# Altium PCB DriverBoard.PcbDoc
Units mil, origin at the board's own origin, x right, y up, seen from the top; angles counter-clockwise.
Board outline 3959.27 x 1236.07 mil, 2 copper layers (Top Layer, Bottom Layer); 45 components, 38 nets, 213 pads, 82 vias.
Unrouted connection lines stored in the file: 41.
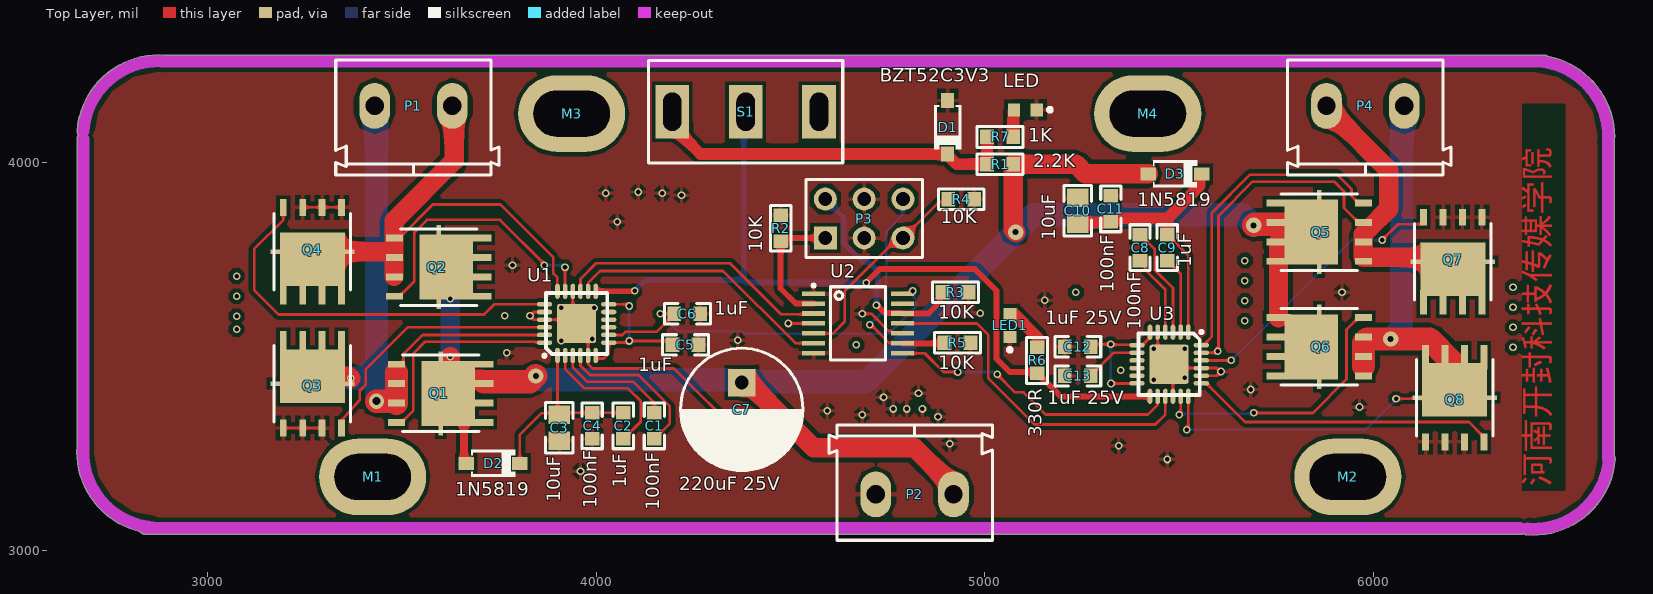
[diagram p0: Top Layer view]
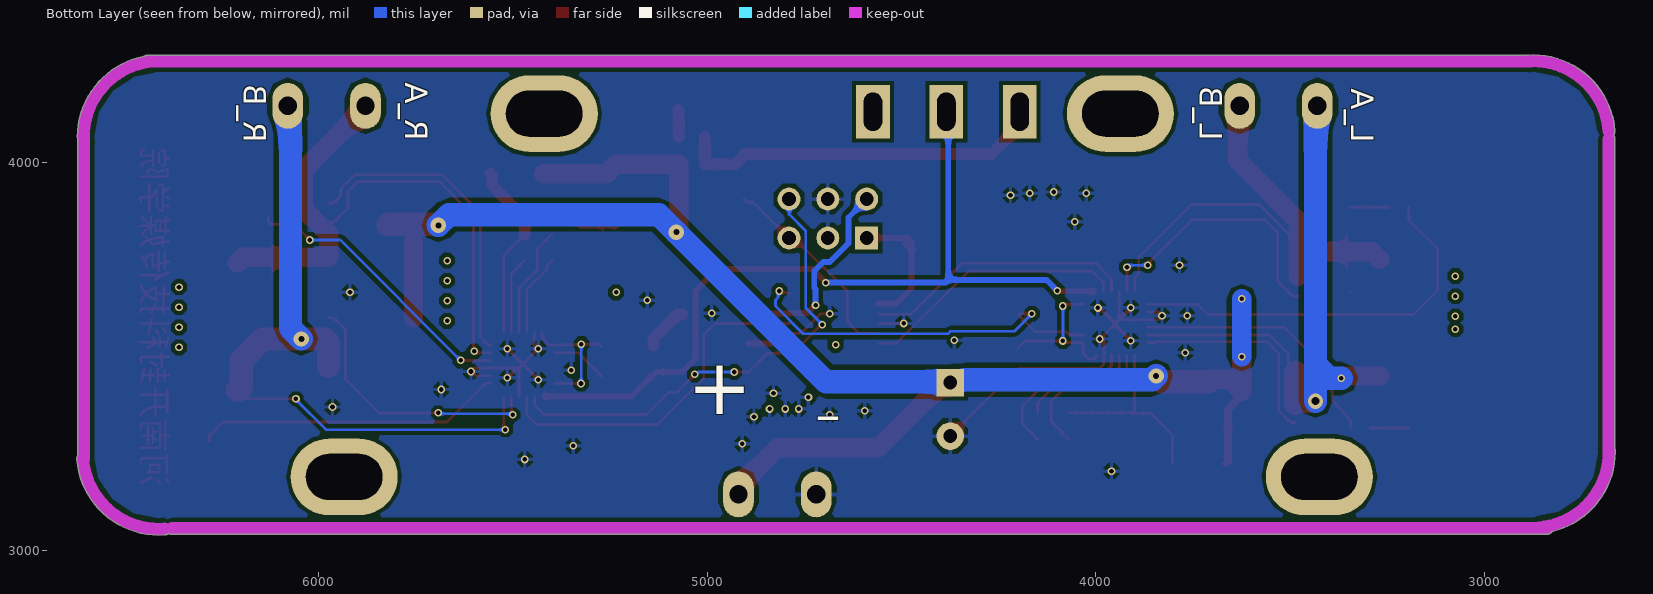
[diagram p1: Bottom Layer view, seen from below]
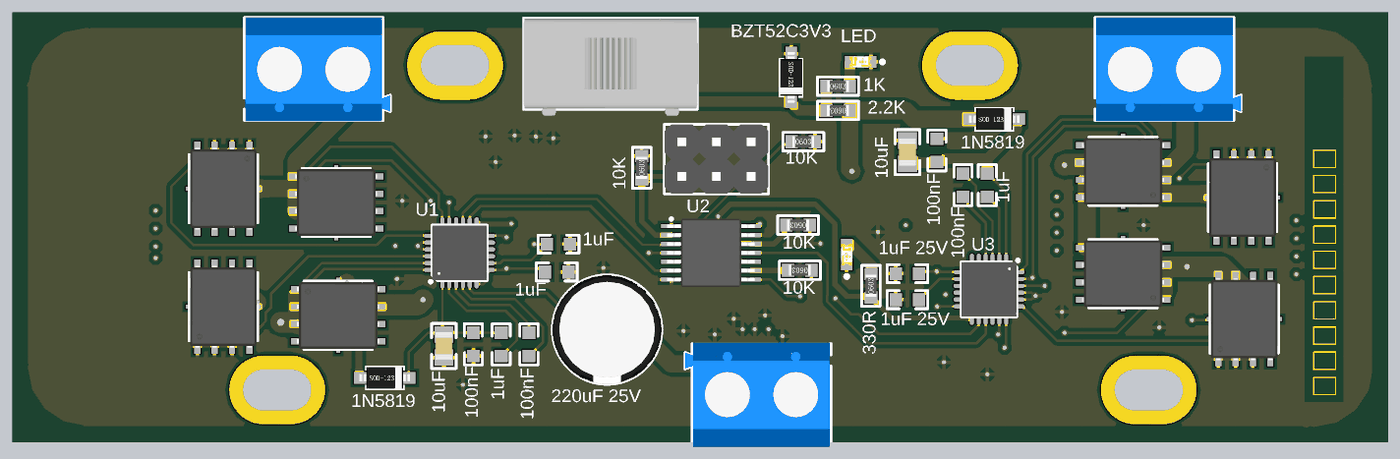
[diagram p2: 3D render of the assembled board from above, using the file's embedded part models]

## Layer stack, top to bottom
Top Solder: solder mask 0.4, Solder Resist, Dk 3.5
Top Layer: signal copper 1.4
Dielectric 1: dielectric 12.6, FR-4, Dk 4.8
Bottom Layer: signal copper 1.4
Bottom Solder: solder mask 0.4, Solder Resist, Dk 3.5

## Board outline
2826.74,3049.25 cw(c2875,3255) 2664.24,3270.59 2664.24,4060 cw(c2680,4060) 2667.82,4070 cw(c2680,4080) 2664.28,4081.21 cw(c2875,4065) 2890.59,4275.76 6440,4275.76 cw(c6440,4260) 6449.44,4272.63 cw(c6410,4065) 6621.34,4065 cw(c6410,4065) 6620.76,4049.41 6620.76,3244.59 cw(c6607.17,3236.61) 6622.93,3236.61 cw(c6607.17,3236.61) 6622.89,3235.4 cw(c6412.17,3251.61) 6395.96,3040.89 cw(c6397.17,3056.61) 6386.73,3044.8 cw(c6377.77,3057.77) 6377.77,3042 2840,3042 cw(c2840,3057.77)

## Design rules (kind name [scope] priority, off if disabled: settings)
Clearance [All] p1: gap=10 ignorepadtopadclearanceinfootprint=TRUE except(0: Arc-Hole Track-Hole SMDPad-Hole THPad-Hole Via-Hole Fill-Hole Poly-Hole Region-Hole Text-Hole)
MinimumSolderMaskSliver [All] p1: minsoldermaskwidth=0
PolygonConnect [All] p1: connectstyle=Relief reliefconductorwidth=10 reliefentries=4 polygonreliefangle="90 Angle" airgapwidth=10
RoutingVias [All] p1: holewidth=28 width=50 viastyle="Through Hole" minholewidth=28 minwidth=50 maxholewidth=28 maxwidth=50
SolderMaskExpansion [All] p1: expansion=4 istentingtop=FALSE
Width [All] p1: maxlimit=60 minlimit=7 preferedwidth=10
29 further rules are at their usual default settings.

## Components (designator, comment, footprint, x,y, rotation, side; value= is the part's Value field where it differs from the comment)
C1 "100nF" CAPC1608[0603]S-N 4150,3321.54 r90 top
C2 "1uF" CAPC1608[0603]S-N 4070,3321.54 r90 top
C3 "10uF" CAPC2012[0805]S-N 3905,3316.54 r270 top
C4 "100nF" CAPC1608[0603]S-N 3990,3321.54 r270 top
C5 "1uF" CAPC1608[0603]S-N 4230,3530 r180 top
C6 "1uF" CAPC1608[0603]S-N 4235,3610 r180 top
C7 "220uF 25V" CAPPR3.5-8X11.5 4375,3363.9 r270 top value=220uF
C8 "100nF" CAPC1608[0603]S-N 5400,3780 r90 top
C9 "1uF" CAPC1608[0603]S-N 5470,3780 r90 top
C10 "10uF" CAPC2012[0805]S-N 5240,3875 r90 top
C11 "100nF" CAPC1608[0603]S-N 5325,3880 r90 top
C12 "1uF 25V" CAPC1608[0603]S-N 5240,3525 r0 top value=1uF
C13 "1uF 25V" CAPC1608[0603]S-N 5240,3450 r0 top value=1uF
D1 "BZT52C3V3" SOD-123-L 4905,4090 r270 top
D2 "1N5819" SOD-123-L 3735,3225 r0 top
D3 "1N5819" SOD-123-L 5490,3970 r0 top
LED "" LEDC1608(0603) 5105,4135 r180 top (schematic designator LED?)
LED1 "Blue" LEDC1608(0603) 5065,3580 r90 top
M1 "MountHole" M3-MountSlot 3407.83,3167.2 r0 top
M2 "MountHole" M3-MountSlot 5917.83,3167.2 r0 top
M3 "MountHole" M3-MountSlot 3920,4102.2 r0 top
M4 "MountHole" M3-MountSlot 5402.83,4102.2 r0 top
P1 "KF/WJ/DG 30x connecter" "KF/WJ/DG 301-2p-5.0mm" 3530,4145 r180 top
P2 "KF/WJ/DG 30x connecter" "KF/WJ/DG 301-2p-5.0mm" 4820,3145 r0 top
P3 "Header 3X2" HDR2X3 4590,3805 r0 top
P4 "KF/WJ/DG 30x connecter" "KF/WJ/DG 301-2p-5.0mm" 5980,4145 r180 top
Q1 "TPH1R403NL" DFN5x6 3600.31,3405 r270 top
Q2 "TPH1R403NL" DFN5x6 3595,3730 r270 top
Q3 "TPH1R403NL" DFN5x6 3270,3430 r0 top
Q4 "TPH1R403NL" DFN5x6 3270,3769.69 r180 top
Q5 "TPH1R403NL" DFN5x6 5860.83,3820 r90 top
Q6 "TPH1R403NL" DFN5x6 5860.83,3525 r90 top
Q7 "TPH1R403NL" DFN5x6 6205,3744.33 r180 top
Q8 "TPH1R403NL" DFN5x6 6210,3394.17 r0 top
R1 "2.2K" RESC1608[0603]S-N 5040,3995 r180 top
R2 "10K" RESC1608[0603]S-N 4475,3830 r90 top
R3 "10K" RESC1608[0603]S-N 4925,3665 r180 top
R4 "10K" RESC1608[0603]S-N 4940,3905 r0 top
R5 "10K" RESC1608[0603]S-N 4930,3535 r180 top
R6 "330R" RESC1608[0603]S-N 5135,3490 r90 top
R7 "1K" RESC1608[0603]S-N 5040,4065 r0 top
S1 "SW-SPDT" SS12D10 4385,4130 r180 top
U1 "DRV8701E" QFN24-4x4 3950,3585 r90 top
U2 "SN74HC125PWR" TSSOP-14 4674.17,3585 r0 top
U3 "DRV8701E" QFN24-4x4 5475,3480 r270 top

## Footprints (in the part's own frame and the unit in brackets; to place one, negate y for a bottom-side part, rotate by r counter-clockwise, add the part's x,y. Pads: shape width x height; smd on the part's side, far side on the other; paste and mask are expansions set on the pad)
CAPC1608[0603]S-N [mm]
  rect 0.9x0.95 smd: 1(-0.85,0) 2(0.85,0)
  silkscreen extent -1.5,-0.66 1.5,0.66, body extent -0.8,-0.41 0.8,0.41, height 0.79
CAPC2012[0805]S-N [mm]
  rect 1.2x1.4 smd: 1(-0.85,0) 2(0.85,0)
  silkscreen extent -1.65,-0.9 1.65,0.9, body extent -1,-0.63 1,0.62, height 1.25
CAPPR3.5-8X11.5 [mm]
  rect 1.8x1.8 hole 0.9: 1(-1.75,0)
  round 1.8 hole 0.9: 2(1.75,0)
  silkscreen extent -4,-4.01 4,4, body extent -4,-3.98 4,3.98, height 11.5
DFN5x6 [mm]
  rect 0.45x1.6 smd: 1(-1.905,2.65) 1(-0.635,2.65) 1(0.635,2.65) 1(1.905,2.65)
  rect 5.5x0.3 smd: 1(0,0)
  rect 4.25x3.5 smd: 1(0,0.5)
  rect 0.45x1.1 smd: 2(1.905,-2.9) 3(-1.905,-2.9) 3(-0.635,-2.9) 3(0.635,-2.9)
  silkscreen extent -2.5,-2.5 2.5,2.5, body extent -2.45,-3 2.45,3, height 1
HDR2X3 [mm]
  rect 1.5x1.5 hole 0.9: 1(0,0)
  round 1.5 hole 0.9: 2(0,2.54) 3(2.54,0) 4(2.54,2.54) 5(5.08,0) 6(5.08,2.54)
  silkscreen extent -1.27,-1.27 6.35,3.81, body extent -1.27,-1.27 6.35,3.81, height 8.54
"KF/WJ/DG 301-2p-5.0mm" [mm]
  oval 2x3 hole 1.2: 1(2.54,0) 2(-2.54,0)
  silkscreen extent -5.6,-3 5.08,4.52, body extent -5.6,-3 5,4.6, height 10
LEDC1608(0603) [mm]
  rect 0.8x0.85 smd: A(0.75,0) C(-0.75,0)
  silkscreen extent -1.73,-0.12 -1.48,0.12, body extent -0.8,-0.4 0.8,0.4, height 0.64
M3-MountSlot [mm]
  oval 7x5 hole 3 slot 5 at 0 deg: 1(0.436,0.579)
QFN24-4x4 [mm]
  rrect10% 2.55x2.55 smd: 0(0,0)
  oval 1x0.3 smd: 1(-2.1,1.25) 2(-2.1,0.75) 3(-2.1,0.25) 4(-2.1,-0.25) 5(-2.1,-0.75) 6(-2.1,-1.25) 13(2.1,-1.25) 14(2.1,-0.75) 15(2.1,-0.25) 16(2.1,0.25) 17(2.1,0.75) 18(2.1,1.25)
  oval 0.3x1 smd: 7(-1.25,-2.1) 8(-0.75,-2.1) 9(-0.25,-2.1) 10(0.25,-2.1) 11(0.75,-2.1) 12(1.25,-2.1) 19(1.25,2.1) 20(0.75,2.1) 21(0.25,2.1) 22(-0.25,2.1) 23(-0.75,2.1) 24(-1.25,2.1)
  silkscreen extent -2.21,-2 2,2.21, body extent -2,-2 2,2, height 0.9
RESC1608[0603]S-N [mm]
  rect 0.9x0.95 smd: 1(-0.85,0) 2(0.85,0)
  silkscreen extent -1.5,-0.67 1.5,0.67, body extent -0.8,-0.4 0.8,0.4, height 0.45
SOD-123-L [mm]
  rect 1x0.85 smd: A(-1.75,0) K(1.75,0)
  silkscreen extent -1.45,-0.9 1.47,0.9, body extent -1.85,-0.8 1.85,0.8, height 1.2
SS12D10 [mm]
  rect 2.2x3.5 hole 1.2 slot 2.5 at 90 deg mask+0.07: 1(-4.8,0) 2(0,0) 3(4.8,0)
  silkscreen extent -6.35,-3.35 6.35,3.35, body extent -6.4,-3.3 6.35,3.8, height 12.5
TSSOP-14 [mm]
  rect 1.5x0.3 smd mask+0.07: 1(-2.9,1.95) 2(-2.9,1.3) 3(-2.9,0.65) 4(-2.9,0) 5(-2.9,-0.65) 6(-2.9,-1.3) 7(-2.9,-1.95) 8(2.9,-1.95) 9(2.9,-1.3) 10(2.9,-0.65) 11(2.9,0) 12(2.9,0.65) 13(2.9,1.3) 14(2.9,1.95)
  silkscreen extent -2.99,-2.4 1.8,2.57, body extent -3.2,-2.5 3.2,2.5, height 1.13

## Part data
C1 C4 C8 C11: library part Cap-Chip_1, "贴片电容", Tolerance=±10%, Voltage=50V, Price(RMB)=0.000, Published=8-Jun-2000, Publisher="Altium Limited", Revision="July-2002: Re-released for DXP Platform."
C2 C5 C6 C9 C12 C13: library part Cap-Chip_2, "贴片电容", Tolerance=±10%, Voltage=25V, Price(RMB)=0.000, Published=8-Jun-2000, Publisher="Altium Limited", Revision="July-2002: Re-released for DXP Platform."
C3 C10: library part Cap-Chip, "贴片电容", Tolerance=±10%, Voltage=25V, Price(RMB)=0.000, Published=8-Jun-2000, Publisher="Altium Limited", Revision="July-2002: Re-released for DXP Platform."
C7: library part Cap-Elect, "Polarized Capacitor (Radial)", Voltage=25V, Price(RMB)=0.000, Published=8-Jun-2000, Publisher="Altium Limited", Revision="July-2002: Re-released for DXP Platform."
D1: library part "Diode Zen", "3.3V稳压二极管 SOD-123", Price(RMB)=0.000, Published=8-Jun-2000, Publisher="Altium Limited", Revision="July-2002: Re-released for DXP Platform."
D2 D3: library part "Diode Schottky", "肖特基二极管 Diode", Imax=500mA, PartNumber=1N5819, Price(RMB)=0.000, Published=8-Jun-2000, Publisher="Altium Limited", Revision="July-2002: Re-released for DXP Platform."
LED: library part "LED Chip Red", "Typical Chip LED", Price(RMB)=0.00, Published=8-Jun-2000, Publisher="Altium Limited", Revision="July-2002: Re-released for DXP Platform."
LED1: library part "LED Chip Blue", "Typical Chip LED", Color=Blue, Price(RMB)=0.00, Published=8-Jun-2000, Publisher="Altium Limited", Revision="July-2002: Re-released for DXP Platform."
M1 M2 M3 M4: "固定孔"
P1 P2 P4: library part "KF/WJ/DG 30x", "接线端子 2Pin"
P3: "Header, 3-Pin, Dual row", LatestRevisionDate=17-Jul-2002, LatestRevisionNote="Re-released for DXP Platform.", Price(RMB)=0.00, Publisher="Altium Limited"
Q1 Q2 Q3 Q4 Q5 Q6 Q7 Q8: "东芝 N沟 MOS"
R1: library part Res-Chip, "贴片电阻", Tolerance=±1%, Price(RMB)=0.000, Published=8-Jun-2000, Publisher="Altium Limited", Revision="July-2002: Re-released for DXP Platform."
R2 R3 R4 R5: library part Res-Chip_1, "贴片电阻", Tolerance=±1%, Price(RMB)=0.000, Published=8-Jun-2000, Publisher="Altium Limited", Revision="July-2002: Re-released for DXP Platform."
R6: library part Res-Chip_3, "贴片电阻", Tolerance=±1%, Price(RMB)=0.000, Published=8-Jun-2000, Publisher="Altium Limited", Revision="July-2002: Re-released for DXP Platform."
R7: library part Res-Chip_2, "贴片电阻", Tolerance=±1%, Price(RMB)=0.000, Published=8-Jun-2000, Publisher="Altium Limited", Revision="July-2002: Re-released for DXP Platform."
S1: "单刀双掷开关 3脚船型、钮子、拨动开关 SPDT Subminiature Toggle Switch", Price(RMB)=0.000, Published=24-Mar-1999, Publisher="Altium Limited"
U1 U3: "DRV8701E Ti全桥驱动芯片"
U2: "三态输出的四路缓冲器 TSSOP-20"

## Via types
v1: diameter 19.68, hole 11.81, Top Layer to Bottom Layer, tented both sides, 77 vias
v2: diameter 39.37, hole 15.75, Top Layer to Bottom Layer, tented both sides, 4 vias
v3: diameter 39.37, hole 20.75, Top Layer to Bottom Layer, tented both sides, 1 vias

## Nets (pads, with @x,y where several pads share a name; then routed paths per layer and width w, separated by ;. In a path a pad name is that pad's centre, name@x,y a point inside that pad or via, vN(x,y) a via of type N, cw(c..) or ccw(c..) an arc to the next point about the centre after c; other vN are vias at no path point)
3V3: D1.K R1.2 R7.1 S1.3 | length 959.3
  Top Layer w30: S1.3 4224.33,4101.69 4224.33,4065.67 4268.89,4021.1 4903.27,4021.1 D1.K 4906.73,4019.37 4906.73,4016.41 4928.15,3995 5003.82,3995 R1.2 R7.1
DVDD: C6.2 U1.8 U2.14 | length 1008.7
  Top Layer w7: U1.8 4067.46,3555.47 4075.33,3563.34 4155.86,3563.34 4196.54,3604.02 4196.54,3605 4200,3608.46 4198.46,3610 v1(4165,3610) ; U2.14 4790.75,3664.18 4810.95,3664.18 4810.95,3664.79 v1(4814.79,3668.63)
  Bottom Layer w7: v1(4165,3610) 4210,3565 4373.91,3565 4380.6,3558.32 4753.31,3558.32 4825,3630 4825,3644.78 4818.04,3651.74 4818.04,3666.2 v1@4815.61,3668.63
GND: C3.2 C4.2 C5.1 C6.1 C7.2 C10.2 C11.2 C12.1 C13.1 D1.A LED1.C LED.C P2.2 P3.3 P3.4 Q3.3 Q4.3 Q7.3 Q8.3 R2.2 R3.1 R4.2 R5.1 U1.0 U1.5 U1.16 U1.20 U1.21 U2.1 U2.4 U2.7 U2.10 U2.13 U3.0 U3.5 U3.16 U3.20 U3.21 | length 1933.6
  Top Layer w7: Q3.3@3195,3315.83 3245,3315.83 Q3.3@3295,3315.83 ; Q4.3@3245,3883.86 3295,3883.86 Q4.3@3345,3883.86 ; U1.20 3839.96,3614.53 3834.36,3608.93 3833.93,3608.93 v1(3830,3605) 3830,3604.8 3839.96,3594.84 U1.21 3940.16,3594.84 U1.16 ; U1.0 U1.0@3979.8,3555.2 ; v1(3990,3545) U1.0@3979.8,3555.2 ; C7.2 4200.86,3469.14 3991.17,3469.14 3979.81,3480.51 3979.81,3502.04 U1.5 3979.53,3554.92 U1.0@3979.8,3555.2 ; v1(4495,3585) U2.4 ; v1(4685,3610) 4708.82,3610 4753.23,3565.59 4758.54,3565.59 4764.72,3559.41 U2.10 ; v1(5435,3520) U3.0@5445.2,3509.8 ; U3.5 5445.47,3510.08 U3.0@5445.2,3509.8 ; U3.0 U3.0@5445.2,3509.8 ; U3.16 5484.84,3470.16 U3.21 5597.8,3470.16 5603.48,3464.47 5605.37,3464.47 v1(5608.57,3461.27) 5597.77,3450.47 U3.20
  Top Layer w10: v1(3910,3625) 3940.16,3594.84 U1.0 ; v1(3910.05,3540.13) 3950,3580.08 U1.0 ; v1(3994.87,3624.95) 3989.95,3624.95 U1.0 ; v1(5435,3440) U3.0 ; v1(5515,3445) 5489.84,3470.16 5484.84,3470.16 U3.0 ; v1(5515,3520) U3.0
  other v1: 3960,3205 5470,3235 5345,3270 4910,3275 4880,3345 4685,3350 4595,3360 4765,3365 4800,3365 4840,3365 5965,3370 4740,3395 4830,3405 5685,3415 5350,3465 3770,3510 4364.24,3541.66 3765,3605 4989.24,3611.61 5155,3645 5920,3665 3785,3735 4054.24,3846.61 4220,3915 4025,3920 4170,3920 4108.49,3923.22
L_A: P1.1 Q1.3 Q3.1 U1.23 | length 1473.5
  Top Layer w7: Q1.3@3504.29,3485.36 3504.29,3505.97 3553.33,3555 3845.31,3555 3845.51,3555.19 3867.04,3555.19 U1.23
  Top Layer w50: Q3.1@3270,3449.69 3362.33,3449.69 v1(3368.43,3443.59)
  Top Layer w60: v3(3435.15,3384.99) Q1.3@3481.4,3385 ; Q1.3@3486.14,3380 3486.14,3430 3486.14,3458.86
  Bottom Layer w60: v1(3368.43,3443.59) 3399.85,3443.59 3435,3478.73 ; P1.1 3433.59,4141.41 3433.59,4108.48 3435,4107.06 3435,3478.73 ; v3(3435.15,3384.99) 3435,3385.14 3435,3478.73
L_B: P1.2 Q2.3 Q4.1 U1.18 | length 1347.1
  Top Layer w7: Q4.1@3345,3665.35 Q4.1@3345.35,3665 ; Q2.3@3480,3705.83 Q2.3@3480.83,3705 ; 3480,3770 3480.83,3770 3480.83,3805 3493.62,3805 3579.62,3891 3754,3891 3890,3755 3890,3713.85 3899.84,3704.01 3899.84,3695.72 3899.87,3668.6 U1.18
  Top Layer w50: Q4.1@3270,3750 3290,3770 3480,3770 ; Q2.3@3480,3705.83 3480,3755 3480,3770 ; P1.2@3635,4140 3635,4003.93 3480,3848.93 3480,3805 3480,3770
L_EN: U1.14 U2.6 | length 692.2
  Top Layer w7: U1.14 3979.81,3667.96 3979.81,3689.49 4010.31,3720 4326.99,3720 4512.81,3534.18 U2.6@4560.46,3534.18
L_EN_IN: P3.5 R4.1 U2.5 | length 534.6
  Top Layer w7: U2.5@4560.83,3559.41 4609.41,3559.41 4640,3590 4640,3668.01 4776.99,3805 P3.5 4882.42,3897.42 4898.95,3897.42 R4.1
L_PH: U1.15 U2.3 | length 705.2
  Top Layer w7: U1.15 3959.84,3699.84 4000,3740 4345,3740 4476.66,3608.34 4558.58,3608.34 U2.3@4560.83,3610.59
L_PH_IN: P3.1 R2.1 U2.2 | length 347.7
  Top Layer w15: R2.1@4485.9,3785 R2.1@4490,3789.1 ; U2.2@4560.83,3636.18 4513.82,3636.18 4475,3675 R2.1 4483.46,3805 P3.1
NetC1_1: C1.1 U1.4 | length 399.8
  Top Layer w7: U1.4 3960.12,3502.04 3960.12,3476.15 3984.13,3452.14 4108.82,3452.14 4190,3370.96 4190,3327.09 4150.98,3288.07 C1.1
NetC1_2: C1.2 U1.3 | length 303.2
  Top Layer w7: U1.3 3940.16,3472.07 3977.09,3435.14 4094.86,3435.14 4150,3380 C1.2
NetC2_1: C2.1 U1.2 | length 379.5
  Top Layer w7: U1.2 3920.47,3467.72 3970.05,3418.14 4081.86,3418.14 4115,3385 4115,3332.09 4070.98,3288.07 C2.1
NetC2_2: C2.2 C3.1 C4.1 D2.K U1.1 | length 512.8
  Top Layer w7: D2.K 3803.9,3298.9 3859.21,3354.21 C3.1@3900.79,3354.21 ; U1.1 C3.1@3900.79,3354.21 ; C3.1 C3.1@3900.79,3354.21 ; C3.1@3905,3355 C4.1 C2.2
NetC5_2: C5.2 U1.6 U1.7 U1.12 | length 395.5
  Top Layer w7: U1.6 3999.21,3497.22 4001.43,3495 4020,3495 4032.68,3507.68 U1.7 4077.35,3535.79 4081.57,3540 4182.32,3540 C5.2@4201.54,3520.78 ; U1.12 4077.35,3634.21 4081.57,3630 v1(4085,3630)
  Bottom Layer w7: v1(4085,3540) v1(4085,3630)
NetC8_1: C8.1 U3.4 | length 210.8
  Top Layer w7: C8.1 5413.86,3732.68 5413.86,3723.13 5465.16,3671.83 U3.4
NetC8_2: C8.2 U3.3 | length 286.5
  Top Layer w7: C8.2 5400.98,3813.46 5437.8,3776.65 5437.8,3723.23 5484.84,3676.18 U3.3
NetC9_1: C9.1 U3.2 | length 198.7
  Top Layer w7: C9.1 5470.98,3746.54 5504.53,3712.99 U3.2
NetC9_2: C9.2 C10.1 C11.1 D3.K U3.1 | length 704.2
  Top Layer w7: C9.2@5470.98,3813.46 5524.21,3760.24 U3.1
  Top Layer w30: C10.1 5243.46,3845 C11.1@5325,3845 ; C11.1 5325.98,3846.54 5328.7,3849.25 5342.92,3849.25 5349.85,3856.18 5465.64,3856.18 5470,3851.83 C9.2 ; 5468.41,3853.41 5554.21,3939.21 5554.21,3968.27 5555.94,3970 D3.K
NetC12_2: C12.2 U3.6 U3.7 U3.12 | length 345.6
  Top Layer w7: C12.2 5280.08,3531.61 v1(5324.45,3531.61) ; v1@5325,3530 5325.13,3530.13 5391.4,3530.13 U3.7 5406.1,3529.21 5425.79,3548.9 U3.6 ; v1(5325.39,3430.39) 5325.59,3430.59 5392.13,3430.59 U3.12
  Bottom Layer w7: v1(5324.45,3531.61) 5324.92,3531.14 5324.92,3430.87 v1(5325.39,3430.39)
NetC13_2: C13.2 U3.8 | length 144.1
  Top Layer w7: C13.2 5273.46,3450.98 5332.01,3509.53 U3.8
NetLED1_A: LED1.A R6.2 | length 124.5
  Top Layer w7: R6.2 R6.2@5138.94,3527.4
  Top Layer w30: LED1.A 5065.75,3608.78 5076.22,3608.78 5138.94,3546.06 R6.2@5138.94,3527.4
NetLED?_A: LED.A R7.2 | length 70.8
  Top Layer w30: R7.2 5073.46,4132.01 5075.47,4134.02 LED.A
NetQ1_2: Q1.2 U1.24 | length 554.1
  Top Layer w7: Q1.2 3498.94,3330 3529.64,3360.7 3529.64,3507.27 3560.37,3538 3843.57,3538 3845.51,3536.07 3867.04,3536.07 U1.24
NetQ2_2: Q2.2 U1.17 | length 709.2
  Top Layer w7: Q2.2 3493.62,3655 3532.29,3693.67 3532.29,3703.67 3532.29,3819.25 3564.8,3851.77 3753.23,3851.77 3866.66,3738.34 v1(3866.66,3735) ; v1(3920,3730) 3920.24,3729.76 3920.24,3667.91 U1.17
  Bottom Layer w7: v1(3866.66,3735) 3911.57,3735 3916.57,3730 v1(3920,3730)
NetQ3_2: Q3.2 U1.22 | length 680.4
  Top Layer w7: Q3.2 3345,3335.66 3348.86,3339.99 3353.5,3345.21 3391.65,3388.09 3391.65,3403.02 3391.77,3403.14 3391.77,3411.77 3406.93,3426.93 3406.93,3466.93 3515.05,3575.05 3867.22,3575.05 U1.22
NetQ4_2: Q4.2 U1.19 | length 1028.1
  Top Layer w7: Q4.2 3195,3851.71 3120,3776.71 3120,3670.8 3182.57,3608.23 3712.01,3608.23 3737.99,3634.21 U1.19
NetQ5_2: Q5.2 U3.24 | length 826.3
  Top Layer w7: U3.24 5562.78,3529.21 5585,3551.43 5585,3870 5683,3968 5907,3968 5944.44,3930.56 5944.44,3912.76 5962.2,3895 Q5.2
NetQ6_2: Q6.2 U3.17 | length 701.3
  Top Layer w7: v1(5500.87,3350) 5500.87,3353.43 5504.53,3357.09 U3.17 ; v1(5692.65,3354.8) 5844.72,3354.8 5931.5,3441.59 5931.5,3569.3 5962.2,3600 Q6.2
  Bottom Layer w7: v1(5500.87,3350) 5503.27,3352.4 5690.25,3352.4 v1(5692.65,3354.8)
NetQ7_2: Q7.2 U3.22 | length 732.5
  Top Layer w7: U3.22 5634.84,3489.84 v1(5635,3490) ; v1(6023.27,3799.84) 6063.78,3840.35 6124.64,3840.35 6130,3845.71 Q7.2
  Bottom Layer w7: v1(5635,3490) 5944.84,3799.84 v1(6023.27,3799.84)
NetQ8_2: Q8.2 U3.19 | length 795.1
  Top Layer w7: U3.19 5571.46,3430.79 5670.78,3331.46 6246.33,3331.46 6279.64,3298.15 6281.23,3296.56 Q8.2@6281.23,3280.57
nSLEEP: R6.1 S1.2 U1.13 U3.13 | length 2119.5
  Top Layer w7: v1@4097.32,3667.68 v1@4100,3665
  Top Layer w15: U1.13@4004.61,3667.68 v1@4097.32,3667.68 ; v1(4695,3690) 4730,3725 4975,3725 5030.77,3669.23 5030.77,3494.23 5065,3460 5131.54,3460 R6.1 5135.98,3456.54 5195.2,3397.32 U3.13@5420,3397.32
  Bottom Layer w15: v1(4099.28,3668.96) 4127.52,3697.2 4380,3697.2 ; S1.2 4380,4125 4380,3697.2 ; v1(4695,3690) 4694.33,3690.67 4386.53,3690.67 4380,3697.2
R_A: P4.1 Q5.3 Q7.1 U3.23 | length 1830.8
  Top Layer w7: U3.23 v1@5592.91,3509.53 ; v1(5600,3513.18) 5602,3515.18 5602,3862 5690,3950 5900,3950 5925,3925 5925,3882.2 5962.2,3845 Q5.3@5975,3845 ; 5975,3755 5975,3745 6103.46,3745 6107.64,3740.83 Q7.1@6210,3740.83
  Top Layer w50: P4.1@5875,4133.09 5897.15,4110.94 5909.06,4110.94 6040,3980 6040,3879.99 5990,3830 5975,3814.99 5975,3755 6195.83,3755 Q7.1@6210,3740.83
R_B: P4.2 Q6.3 Q8.1 U3.18 | length 1842.6
  Top Layer w7: v1(5520,3311.72) 5520,3315.15 5524.21,3319.36 U3.18 ; Q6.3@5975,3450 5975,3475 ; v1(6059.06,3391.1) Q8.1@6206.93,3391.1
  Top Layer w60: 5975,3475 5975,3500 5975,3535 5985,3545 v2(6045,3545) 6145,3545 6200,3490 6200,3418.27 6204.41,3413.86 Q8.1@6210,3413.86
  Bottom Layer w7: v1(5520,3311.72) 5981.72,3311.72 v1@6060,3390
  Bottom Layer w60: v2(6045,3545) 6073.11,3573.11 6073.11,4105.17 6076.41,4108.48 6076.41,4141.41 P4.2
R_EN: U2.8 U3.14 | length 753.4
  Top Layer w7: U2.8 4845.94,3508.23 4894.17,3460 v1(4930.89,3460) ; v1(5032.5,3453.83) 5078.63,3407.7 5100.31,3407.7 5157.18,3350.83 5420.52,3350.83 5445.19,3375.51 5445.19,3397.04 U3.14
  Bottom Layer w7: v1@4931.71,3460 5022.9,3460 5029.07,3453.83 v1(5032.5,3453.83)
R_EN_IN: P3.6 R5.2 U2.9 | length 570.8
  Top Layer w7: v1(4704.15,3581.66) 4707.52,3581.66 4754.17,3535 4787.17,3535 U2.9 ; R5.2@4895.35,3533.82 R5.2
  Top Layer w15: U2.9@4789.17,3533.82 R5.2@4895.35,3533.82
  Bottom Layer w7: v1(4704.15,3581.66) 4746.97,3624.48 4746.97,3822.82 4789.12,3864.97 4789.12,3904.12 P3.6
R_PH: U2.11 U3.15 | length 906.8
  Top Layer w7: U2.11@4789.17,3585 4980,3585 5009.77,3555.23 5009.77,3464.11 5009.16,3463.5 5009.16,3444.16 5128.32,3325 5439.31,3325 5465.16,3350.85 U3.15
R_PH_IN: P3.2 R3.2 U2.12 | length 553.2
  Top Layer w15: v1(4721.64,3632.16) 4722.91,3632.16 4742.89,3612.18 4786.75,3612.18 U2.12 ; U2.12@4789.17,3610.59 4855.59,3610.59 4885,3640 4885,3653.46 R3.2@4896.54,3665
  Bottom Layer w15: P3.2 4637.03,3857.97 4637.03,3791.47 4685.26,3743.23 4701.77,3743.23 4725,3720 4725,3676.82 4721.64,3673.46 v1(4721.64,3632.16)
VM: C7.1 D2.A D3.A P2.1 Q1.1 Q2.1 Q5.1 Q6.1 R1.1 | length 4305.4
  Top Layer w10: Q5.1@5752.64,3841.14 Q5.1@5756.5,3845 ; Q5.1@5826.14,3835 Q5.1@5841.14,3820
  Top Layer w20: Q1.1@3625,3410 3620,3405 3660,3365 3660,3231.1 D2.A
  Top Layer w50: v1(3625,3499.5) 3625,3410 3656.66,3441.66 3704.65,3441.66 Q1.1@3711.14,3435.16 ; C7.1@4370,3430 4380.43,3419.57 4405.43,3419.57 4560,3265 4819.69,3265 4920,3164.68 P2.1 ; v2(5080,3820) 5073.46,3826.54 R1.1 5234.78,3995 5259.78,3970 D3.A ; Q6.1@5756.5,3600 5756.5,3745 Q5.1@5756.5,3795 ; Q5.1@5821.14,3840 Q5.1@5826.14,3835
  Top Layer w60: Q1.1@3711.14,3435.16 3830.16,3435.16 v2(3845,3450) ; v2(5692.5,3837.5) 5695,3840 Q5.1@5821.14,3840
  Bottom Layer w50: v1(3625,3499.5) v1(3625,3648.5)
  Bottom Layer w60: v2(3845,3450) 3855,3440 4339.36,3440 4341.13,3438.23 4369.57,3438.23 C7.1 4377.2,3435 4695,3435 v2(5080,3820) 5125,3865 5665,3865 v2(5692.5,3837.5)
pads on no net: M1.1 M2.1 M3.1 M4.1 S1.1 U1.9 U1.10 U1.11 U3.9 U3.10 U3.11
copper on no net:
  other v1: 6360,3523.33 4670,3530 3075,3570 6360,3575 5670,3591.67 3075,3603.33 6360,3626.67 5670,3643.33 3075,3655 5235,3665 6360,3678.33 5670,3695 3075,3706.67 5670,3746.67

## Polygon pours and split planes (outlines as drawn)
GND on Bottom Layer "NONET_L-01_P-001" (solid, remove dead copper, pour order 0): 2765,4250 6490,4250 6600,4140 6600,3155 6505,3060 2795,3060 2680,3175 2680,4145
GND on Top Layer "NONET_L-01_P-001" (solid, remove dead copper, pour order 3): 2795,4250 2800,4245 6500,4245 6595,4150 6595,3175 6480,3060 2820,3060 2685,3195 2685,4100

## Keep-outs
Keep-Out Layer:
  lines w31.5: 2680,3240 2680,4060 ; 2680,3270 ccw(c2875,3255) 2860,3060 ; 2680,4080 cw(c2875,4065) 2890,4260 ; 2840,3057.77 6377.77,3057.77 ; 2880,4260 6440,4260 ; 6397.17,3056.61 ccw(c6412.17,3251.61) 6607.17,3236.61 ; 6425,4260 cw(c6410,4065) 6605,4050 ; 6605,3236.61 6605,4075

## Other copper
Top Layer:
  text "河南开封科技传媒学院" at 6474.62,3165 h110 r90

## Silkscreen, mask and mechanical layers (free items; w line width, h text height)
Top Overlay:
Bottom Overlay:
  text "L_B" at 3752.24,4055 h100 r90
  text "R_A" at 5797.24,4055 h100 r90
  text "L_A" at 3362.24,4050 h100 r90
  text "R_B" at 6212.24,4050 h100 r90
  text "-" at 4725,3438.13 h250 r180
  text "+" at 4885,3304.08 h250
Top Solder:
  text "河南开封科技传媒学院" at 6474.62,3165 h110 r90